# Altium PCB slave-14-mc33775.PcbDoc (part 2 of 5)
Units mil, origin at the board's own origin, x right, y up, seen from the top; angles counter-clockwise.
Board outline 6512.5 x 4562.01 mil, 6 copper layers (Top Copper, Supply, Signal Layer 1, Signal Layer 2, GND, Bot Copper), stack 69.773 mil thick; 427 components, 0 nets, 1131 pads, 1672 vias.
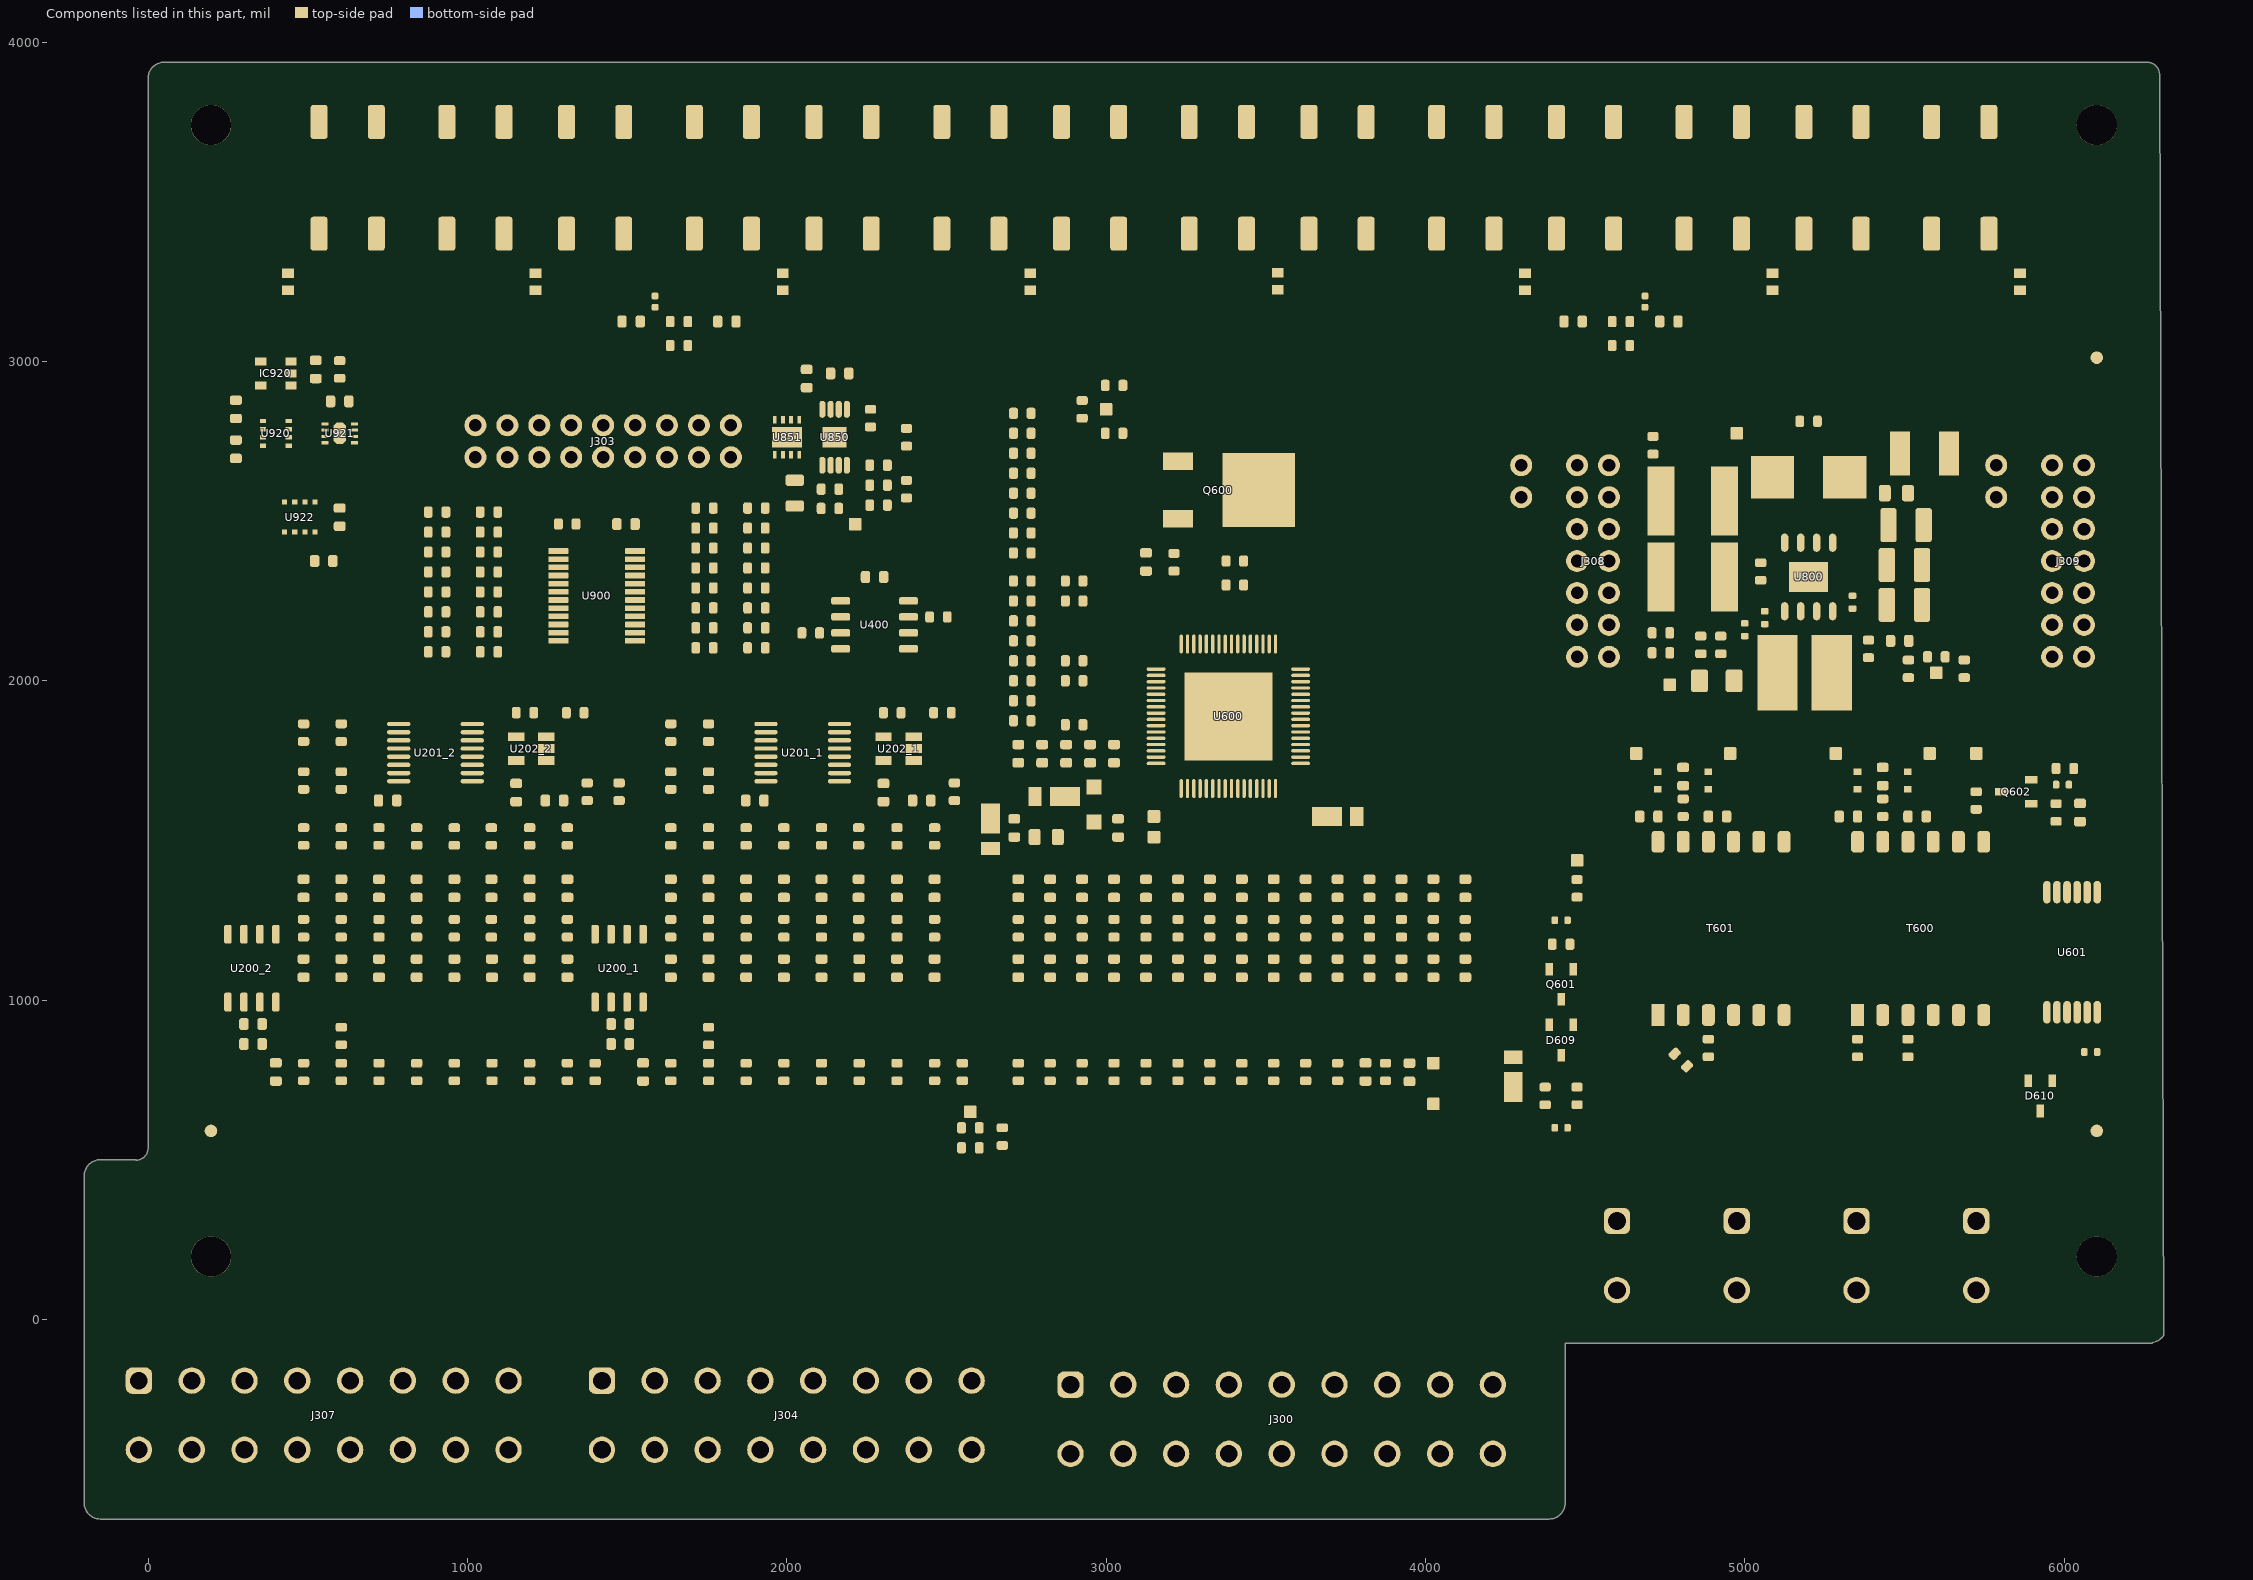
[diagram p6: the components of this part, seen from the top]

## Footprints (in the part's own frame and the unit in brackets; to place one, negate y for a bottom-side part, rotate by r counter-clockwise, add the part's x,y. Pads: shape width x height; smd on the part's side, far side on the other; paste and mask are expansions set on the pad) (continued)
S1MSP1 [mm] "SODFL, 2-Leads, Body 1,78x3,70mm, IPC Medium Density"
  rect 2.4x1.5 smd: 1(0.85,0)
  rect 1.05x1.5 smd: 2(-1.525,0)
  silkscreen extent 1.73,-1.07 1.83,-0.97, body extent -1.85,-0.96 1.85,0.96, height 1
SHT3X [mm] "SON, 8-Leads, Body 2,50x2,50mm, Pitch 0,50mm, Thermal Pad 1,80x1,09mm, IPC Medium Density"
  rect 0.55x0.25 smd: 1(-1.17,0.75) 2(-1.17,0.25) 3(-1.17,-0.25) 4(-1.17,-0.75) 5(1.17,-0.75) 6(1.17,-0.25) 7(1.17,0.25) 8(1.17,0.75)
  oct 1x1.7 smd: 9(0,0)
  Top Copper region: 0,-0.849 0.5,-0.849 0.5,0.851 0,0.851
  Top Copper region: -0.499,-0.85 0.001,-0.85 0.001,0 -0.499,0
  silkscreen extent -1.9,-1.45 1.45,1.5, body extent -1.25,-1.25 1.25,1.25, height 0.9
SOD523_PESD_NEXPERIA [mm] "SODFL, 2-Leads, Body 0,80x1,60mm, IPC Medium Density"
  rect 0.5x0.6 smd: 1(-0.7,0) 2(0.7,0)
  silkscreen extent -0.9,0.55 -0.8,0.65, body extent -0.8,-0.43 0.8,0.43, height 0.65
SOIC127P600X175-8N [mm] "SOIC, 8-Leads, Body 4,90x3,90mm, Pitch 1,27mm, IPC Medium Density"
  rrect50% 1.5x0.6 smd: 1(-2.7,1.905) 2(-2.7,0.635) 3(-2.7,-0.635) 4(-2.7,-1.905) 5(2.7,-1.905) 6(2.7,-0.635) 7(2.7,0.635) 8(2.7,1.905)
  silkscreen extent -2.8,-2.45 1.55,2.8, body extent -3,-2.45 3,2.45, height 1.75
SOT95P237X110-3N [mm] "SOT23, 3-Leads, Body 2,92x2,37mm, Pitch 0,95mm, IPC Medium Density"
  rect 1x0.6 smd: D(1.2,0) G(-1.2,0.95) S(-1.2,-0.95)
  silkscreen extent -0.3,-1.5 0.7,1.5, body extent -1.32,-1.52 1.32,1.52, height 1.1
SOT-23-OT5_L [mm] "SOT23, 5-Leads, Body 2.9x1.7mm, Pitch 0.95mm, Lead Span 2.8mm, IPC High Density"
  rect 0.9x0.65 smd: 1(-1.2,0.95) 2(-1.2,0) 3(-1.2,-0.95) 4(1.2,-0.95) 5(1.2,0.95)
  silkscreen extent -1.33,-1.55 0.35,1.95, body extent -0.9,-1.55 0.9,1.55, height 1.45
SRP7028A [mm] "Bourns SRP7028A Series"
  rect 3.45x3.35 smd: 1(-2.875,0) 2(2.875,0)
  silkscreen extent -3.8,-3.45 3.8,3.45, body extent -3.45,-3.3 3.45,3.3, height 2.86
Testpoint_S1 [mm] "Testpunkt, quardratisch 1mm"
  rrect20% 1x1 smd paste-0.5: 1(0,0)
TPS7A16_VSON [mm] "SON, 8-Leads, Body 3,00x3,00mm, Pitch 0,65mm, Thermal Pad 2,40x1,49mm, IPC Medium Density"
  rect 0.6x0.3 smd: 1(-1.4,0.975) 2(-1.4,0.325) 3(-1.4,-0.325) 4(-1.4,-0.975) 5(1.4,-0.975) 6(1.4,-0.325) 7(1.4,0.325) 8(1.4,0.975)
  rect 1.65x2.4 smd: 9(0,0)
  silkscreen extent -2.15,-1.7 1.7,1.75, body extent -1.55,-1.55 1.55,1.55, height 1
TPS7A16A-Q1 [mm] "TSOP, 8-Leads, Body 3,00x3,00mm, Pitch 0,65mm, Thermal Pad 1,92x1,60mm, IPC Medium Density"
  oval 1.35x0.5 smd: 1(-2.225,0.975) 2(-2.225,0.325) 3(-2.225,-0.325) 4(-2.225,-0.975) 5(2.225,-0.975) 6(2.225,-0.325) 7(2.225,0.325) 8(2.225,0.975)
  rect 1.6x1.92 smd: 9(0,0)
  silkscreen extent -2.35,-1.55 1.15,1.9, body extent -2.45,-1.55 2.45,1.55, height 1.1
TYS6045470M-10 [mm] "Precision Wire Wound Inductor, 2-Leads, Body 6,00x6,00mm, IPC Medium Density"
  rect 3.2x6 smd: 1(-2.15,0) 2(2.15,0)
  silkscreen extent -4.05,-3.15 0.15,3.15, body extent -3.1,-3 3.1,3, height 4.8
Vishay_THJP_0603 [mm] "ThermaWick Ceramic thermal coupling, 2-Leads, Body 1,55x0,84mm, IPC Medium Density"
  rect 0.75x0.95 smd: 1(-0.675,0) 2(0.675,0)
  body extent -0.84,-0.49 0.84,0.49, height 0.89

## Part data
3.3V_DCDC 3.3V_LDO ALARM_IN ALARM_OUT enable_DCDC GND TPL_H_N TPL_H_P TPL_L_N TPL_L_P Vaux Vbat Vbat_con_ext Vddc Vin_DCDC Vmodule: "Testpoint, square", Automotive Qualified=False, Part Number=Testpoint_Square
C200_1 C200_2 C203_1 C203_2 C220_1 C220_2: library part gen_C_ceramic_1u_35V_X7R_0603, "MLCC", Capacitance=1u, Case EIA=0603, Case Metric=1608, Dielectric=X7R, Operating Temperature="-55°C - +125°C", PnP Package=0603C, PnP Value=1uF/35V/X7R, Rated Voltage=35V, Supplier Part Number 1=2906941, AEC-Q Norm=AEC-Q200, Automotive Qualified=True, ECCN=EAR99, Part Number=gen_C_ceramic_1u_35V_X7R_0603, PnP equipped=x, Supplier 1=Farnell
C201_1 C201_2 C212_1 C212_2 C213_1 C213_2 C214_1 C214_2 C215_1 C215_2 C216_1 C216_2 C217_1 C217_2 C218_1 C218_2 C219_1 C219_2 C221_1 C221_2 C400 C601 C603 C604 C605 C606 C613 C617 C807 C850 C852 C900 C920 C921 C922 C923 C924 C925: library part gen_C_ceramic_100n_100V_X7R_0603, "MLCC", Capacitance=100n, Case EIA=0603, Case Metric=1608, Dielectric=X7R, PnP Package=0603C, Rated Voltage=100V, Supplier Part Number 1=490-13420-1-ND, Automotive Qualified=True, Part Number=gen_C_ceramic_100n_100V_X7R_0603, Supplier 1=Digikey, Supplier 2=Mouser, Supplier Part Number 2=81-GCJ188R72A104KA1D
C202_1 C202_2 C204_1 C204_2 C205_1 C205_2 C206_1 C206_2 C207_1 C207_2 C208_1 C208_2 C209_1 C209_2 C210_1 C210_2 C211_1 C211_2 C607 C610: library part gen_C_ceramic_10n_100V_X7R_0603, "MLCC", Capacitance=10n, Case EIA=0603, Case Metric=1608, Dielectric=X7R, PnP Package=0603C, PnP Value=10nF/100V/X7R, Rated Voltage=100V, Supplier Part Number 1=1301715, AEC-Q Norm=AEC-Q200, Automotive Qualified=True, ECCN=EAR99, Part Number=gen_C_ceramic_10n_100V_X7R_0603, Supplier 1=Farnell, Supplier 2=Farnell, Supplier 3=Farnell, Supplier Part Number 2=2821192, Supplier Part Number 3=2210878
C500 C501 C502 C503 C504 C505 C506 C507 C508 C509 C510 C511 C512 C513 C514 C515 C516 C517 C518 C519 C520 C521 C522 C523 C524 C525 C526 C527 C528 C529 C530 C531 C600 C700 C701 C702 C703: library part gen_C_ceramic_47n_100V_X7R_0603, "MLCC", Capacitance=47n, Case EIA=0603, Case Metric=1608, Dielectric=X7R, PnP Package=0603C, Rated Voltage=100V, Supplier Part Number 1=2478249, Automotive Qualified=True, Part Number=gen_C_ceramic_47n_100V_X7R_0603, Supplier 1=Farnell, Supplier 2=Farnell, Supplier 3=Farnell, Supplier Part Number 2=2708699, Supplier Part Number 3=2905110
C602 C608 C609 C612: library part gen_C_ceramic_220p_50V_C0G_0603, "MLCC", Capacitance=220p, Case EIA=0603, Case Metric=1608, Dielectric=C0G, PnP Package=0603C, Rated Voltage=50V, Supplier Part Number 1=603-AC603JRNPO9BN221, AEC-Q Norm=AEC-Q200, Automotive Qualified=True, ECCN=EAR99, Part Number=gen_C_ceramic_220p_50V_C0G_0603, Supplier 1=Mouser
C611: library part gen_C_ceramic_470n_50V_X7R_0603, "MLCC", Capacitance=470n, Case EIA=0603, Case Metric=1608, Dielectric=X7R, PnP Package=0603C, Rated Voltage=50V, Supplier Part Number 1=2547051, AEC-Q Norm=AEC-Q200, Automotive Qualified=True, ECCN=EAR99, Part Number=gen_C_ceramic_470n_50V_X7R_0603, Supplier 1=Farnell
C614 C615 C616 C618: library part gen_C_ceramic_22p_50V_C0G_0402, "MLCC", Capacitance=22p, Case EIA=0402, Case Metric=1005, Dielectric=C0G, PnP Package=0402C, Rated Voltage=50V, Supplier Part Number 1=1856067, Tolerance=1%, Automotive Qualified=True, Part Number=gen_C_ceramic_22p_50V_C0G_0402, Supplier 1=Farnell
C800 C801: library part gen_C_ceramic_15u_100V_X7R_2220, "Stacked MLCC", Capacitance=15u, Case EIA=2220, Case Metric=5750, Dielectric=X7R, Rated Voltage=100V, Supplier Part Number 1=2781468, Automotive Qualified=True, Part Number=gen_C_ceramic_15u_100V_X7R_2220, Supplier 1=Farnell, Supplier 2=Digikey, Supplier 3=Mouser, Supplier Part Number 2=490-5838-1-ND, Supplier Part Number 3=81-KCM55WR72A156MH1K
C802 C803: library part gen_C_ceramic_1u_100V_X7R_1210, "MLCC", Capacitance=1u, Case EIA=1210, Case Metric=3225, Dielectric=X7R, Rated Voltage=100V, Supplier Part Number 1=1301722, Automotive Qualified=True, AVT Set=x, Part Number=gen_C_ceramic_1u_100V_X7R_1210, Supplier 1=Farnell
C804: library part gen_C_ceramic_3u3_100V_X7R_1812, "MLCC", Capacitance=3u3, Case EIA=1812, Case Metric=4532, Dielectric=X7R, Rated Voltage=100V, Supplier Part Number 1=2579025, Automotive Qualified=True, Part Number=gen_C_ceramic_3u3_100V_X7R_1812, Supplier 1=Farnell, Supplier 2=Digikey, Supplier 3=Mouser, Supplier Part Number 2=399-13376-1-ND, Supplier Part Number 3=80-C1812C335K1RAUTO
C805 C808: library part gen_C_ceramic_2n2_100V_X7R_0402, "MLCC", Capacitance=2n2, Case EIA=0402, Case Metric=1005, Dielectric=X7R, PnP Package=0402C, Rated Voltage=100V, Supplier Part Number 1=490-4911-1-ND, Automotive Qualified=True, Part Number=gen_C_ceramic_2n2_100V_X7R_0402, Supplier 1=Digikey
C806: library part gen_C_ceramic_2u2_100V_X7R_1210, "MLCC", Capacitance=2u2, Case EIA=1210, Case Metric=3225, Dielectric=X7R, Rated Voltage=100V, Supplier Part Number 1=2781417, Automotive Qualified=True, AVT Set=x, Part Number=gen_C_ceramic_2u2_100V_X7R_1210, Supplier 1=Farnell, Supplier 2=Farnell, Supplier Part Number 2=2579027
C809: library part gen_C_ceramic_100p_200V_C0G_0402, "MLCC", Capacitance=100p, Case EIA=0402, Case Metric=1005, Dielectric=C0G, PnP Package=0402C, Rated Voltage=200V, Supplier Part Number 1=2426878, Tolerance=5%, Automotive Qualified=True, Part Number=gen_C_ceramic_100p_200V_C0G_0402, Supplier 1=Farnell, Supplier 2=Digikey, Supplier 3="RS Components", Supplier Part Number 2=399-11551-1-ND, Supplier Part Number 3=8353949
C810: library part gen_C_ceramic_22u_6V3_X7R_1206, "MLCC", Capacitance=22u, Case EIA=1206, Case Metric=3216, Dielectric=X7R, Rated Voltage=6.3V, Supplier Part Number 1=2672216, Automotive Qualified=True, Part Number=gen_C_ceramic_22u_6V3_X7R_1206, Supplier 1=Farnell, Supplier 2=Farnell, Supplier Part Number 2=2211066
C851: library part gen_C_ceramic_2u2_10V_X7R_0805, "MLCC", Capacitance=2u2, Case EIA=0805, Case Metric=2012, Dielectric=X7R, Rated Voltage=10V, Supplier Part Number 1=2478259, Automotive Qualified=True, Part Number=gen_C_ceramic_2u2_10V_X7R_0805, Supplier 1=Farnell, Supplier 2=Farnell, Supplier Part Number 2=2070513
D600 D601 D608: "Schottky Diode", Breakdown Voltage=100V, Continuous Forward Current=1A, Manufacturer="Diodes Inc.", Operating Temperature="−55°C - +175°C", PnP Package=POWERDI123, Supplier Part Number 1=621-DFLS1-100Q-7, Automotive Qualified=True, ComponentLink1Description=Datasheet, ComponentLink1URL=https://www.diodes.com/assets/Datasheets/ds30497.pdf, Part Name=DFLS1100Q-7, Part Number=DFLS1100Q-7, Supplier 1=Mouser, Supplier 2=Digikey, Supplier 3=Farnell, Supplier Part Number 2=DFLS1100Q-7DICT-ND, Supplier Part Number 3=3127293
D602: "400W Transient Voltage Suppressor", Breakdown Voltage=70.20V, Manufacturer=Nexperia, Operating Temperature="-55°C - +150°C", Part Name=PTVSxS1UR, Supplier Part Number 1=771-PTVS60VS1UR115, AEC-Q Norm=AEC-Q101, Automotive Qualified=True, ComponentLink1Description=Datasheet, ComponentLink1URL=https://assets.nexperia.com/documents/data-sheet/PTVSXS1UR_SER.pdf, ECCN=EAR99, Part Number=PTVS60VS1UR, Supplier 1=Mouser, Supplier 2=Digikey, Supplier Part Number 2=1727-5879-1-ND
D603: "1.0A surface mount glass passivated rectifier", Breakdown Voltage=1000V, Continuous Forward Current=1A, Manufacturer="Diodes Inc.", Operating Temperature="-55°C - +150°C", Supplier Part Number 1=621-S1MSP1-7, Automotive Qualified=False, ComponentLink1Description=Datasheet, ComponentLink1URL=https://www.mouser.de/datasheet/2/115/S1MSP1-1019698.pdf, ECCN=EAR99, Part Name=S1MSP1-7, Part Number=S1MSP1-7, Supplier 1=Mouser, Supplier 2=Digikey, Supplier Part Number 2=S1MSP1-7-ND
D604 D605 D606 D607: "Very low capacitance bidirectional ESD protection diode", Breakdown Voltage=6.8V, Manufacturer=Nexperia, Operating Temperature="-55°C - +150°C", PnP Package=SOD523, Supplier Part Number 1=771-PESD5V0V1BB115, AEC-Q Norm=AEC-Q101, Automotive Qualified=True, ComponentLink1Description=Datasheet, ComponentLink1URL=https://assets.nexperia.com/documents/data-sheet/PESD5V0V1BB.pdf, ECCN=EAR99, Part Name=PESD5V0V1BB, Part Number=PESD5V0V1BB, Supplier 1=Mouser, Supplier 2=Digikey, Supplier 3=Farnell, Supplier Part Number 2=1727-5808-1-ND, Supplier Part Number 3=2069367
D609 D610: "ESD-Schutzbaustein", Breakdown Voltage=8V, Manufacturer="ON Semiconductor", PnP Package=SOT23-3, Supplier Part Number 1=2317483, Automotive Qualified=True, ComponentLink1Description=Datasheet, ComponentLink1URL=http://www.farnell.com/datasheets/2354265.pdf, Part Name=PACDN042Y3R, Part Number=PACDN042Y3R, Supplier 1=Farnell, Supplier 2=Digikey, Supplier 3=Mouser, Supplier Part Number 2=PACDN042Y3ROSCT-ND, Supplier Part Number 3=748-PACDN042Y3R
FD_LL FD_LR FD_UR: library part Fiducial_2
IC920: library part CMP-0192-00211-1, "2-Wire High-Accuracy Temperature Sensor, Slave Address 000, 5-Pin SOT-23, -55°C to +125°C Temperature, Tape and Reel", Code_IPC=SOT23-5, DatasheetVersion="revD, Nov-2010", PackageDescription="5-Lead Plastic Small Outline Transistor (OT) [SOT-23]", PackageReference=SOT-23-OT5, PackageVersion="revBB, Aug-2009"
J300: library part CMP-1502-00501-2, Color=White, Contact Resistance=10mΩ, Current Rating=6A, Insulation Resistance=1GΩ, Max Operating Temperature=105°C, Min Operating Temperature=-40°C, Operating Supply Voltage=600V, Connector Type="Male Pin, Socket", Contact Material=Copper, Contact Plating=Tin, Fastening Type=Ramp, Gender=Male, Height=12.8mm, Lead Pitch=4.2mm, Length=39mm, Mount="Through Hole", NexarPartId=23024638, Number of Contacts=18, Number of Pins=18, Number of Positions=18, Number of Rows=2, Orientation=Vertical, Pitch=4.2mm, REACH SVHC=Unknown, RoHS=Compliant, Row Spacing=4.191mm, Termination=Solder, Width=39.1mm
J301 J302 J305 J306: library part CMP-1502-00493-2, Color=White, Contact Resistance=10mΩ, Current Rating=9A, Flammability Rating="UL94 V-0", Insulation Resistance=1GΩ, Max Operating Temperature=105°C, Min Operating Temperature=-40°C, Operating Supply Voltage=600V, Connector Type="Male Pin, Socket", Contact Gender=Male, Contact Material=Copper, Contact Plating=Tin, Fastening Type=Ramp, Gender=Male, Height=12.8mm, Housing Material=Nylon, Lead Length=3.5mm, Lead Pitch=4.2mm, Length=5.4mm, Mount="Through Hole", NexarPartId=8917578, Number of Contacts=2, Number of Pins=2, Number of Positions=2, Number of Rows=2, Orientation=Vertical, Pitch=4.2mm, REACH SVHC=Unknown, RoHS=Compliant, Row Spacing=5.5118mm, Termination=Solder, Voltage Rating=600V, Width=5.5mm
J303: "Standard Pinheader, THD, gerade, 2.54mm, 2-reihig", Operating Temperature="−40 °C - +105 °C", Part Name=PinHeader, Rated Current=3A, Rated Voltage=250V, Supplier Part Number 1=2025256, Automotive Qualified=False, Circuits=18, Part Number=gen_pinheader_2.54_2x9, Supplier 1=Farnell
J304 J307: library part CMP-1502-00500-2, Color=White, Contact Resistance=10mΩ, Current Rating=6A, Insulation Resistance=1GΩ, Max Operating Temperature=105°C, Min Operating Temperature=-40°C, Operating Supply Voltage=600V, Connector Type="Male Pin, Socket", Contact Material=Copper, Contact Plating=Tin, Fastening Type=Ramp, Gender=Male, Height=12.8mm, Lead Pitch=4.2mm, Length=34.8mm, Mount="Through Hole", NexarPartId=23024631, Number of Contacts=16, Number of Pins=16, Number of Positions=16, Number of Rows=2, Orientation=Vertical, Pitch=4.2mm, REACH SVHC=Unknown, RoHS=Compliant, Row Spacing=4.191mm, Termination=Solder, Width=34.9mm
J308 J309: "Standard Pinheader, THD, gerade, 2.54mm, 2-reihig", Operating Temperature="−40 °C - +105 °C", Part Name=PinHeader, Rated Current=3A, Rated Voltage=250V, Supplier Part Number 1=200-TSW10707GD, Automotive Qualified=False, Circuits=14, Part Number=gen_pinheader_2.54_2x7, Supplier 1=Mouser
J311 J312: "Standard Pinheader, THD, gerade, 2.54mm", Operating Temperature="−40 °C - +105 °C", Part Name=PinHeader, Rated Current=3A, Rated Voltage=250V, Supplier Part Number 1=2505044, Automotive Qualified=False, Circuits=2, Part Number=gen_pinheader_2.54_2, Supplier 1=Farnell
L800: library part SRP7028A-R47M, "FIXED IND 470NH 17.5A 4.2 MOHM", Manufacturer="Bourns Inc", Operating Temperature="-40°C - +150°C", Rated Current=17.5A, Saturation Current=26A, Supplier Part Number 1=SRP7028A-R47MCT-ND, Automotive Qualified=True, ComponentLink1Description=Datasheet, ComponentLink1URL=https://www.bourns.com/docs/Product-Datasheets/SRP7028A.pdf, Inductance=470nH, Part Number=SRP7028A-R47M, Supplier 1=Digikey, Supplier 2=Farnell, Supplier Part Number 2=2434106
L801: library part TYS6045470M-10, "Power Inductor", Manufacturer="Laird-Signal Integrity Products", Operating Temperature="-55°C - +150°C", Rated Current=1.2A, Saturation Current=1.4A, Supplier Part Number 1=240-2745-1-ND, Automotive Qualified=True, ComponentLink1Description=Datasheet, ComponentLink1URL=http://assets.lairdtech.com/home/brandworld/files/TYS6045470M-10.pdf, Inductance=47µH, Part Number=TYS6045470M-10, Supplier 1=Digikey
LD600 LD601 LD800 LD850: library part LED_0603_green_AECQ, "TLMG1100-GS08", Breakdown Voltage=5V, Continuous Forward Current=20mA, Forward Voltage @ 20mA=2.1V, Manufacturer=Vishay, Operating Temperature="-40°C - 100°C", PnP Package=LED_0603, Supplier Part Number 1=2293494, Automotive Qualified=True, Color=green, ComponentLink1Description=Datasheet, ComponentLink1URL=http://www.farnell.com/datasheets/2049164.pdf, Part Number=LED_0603_green_AECQ, Supplier 1=Farnell, Supplier 2=Digikey, Supplier Part Number 2=751-1165-1-ND
MP_LL MP_LR MP_UL MP_UR: "Hole, M3, with Isolation", Automotive Qualified=False, Part Number=Hole_3.2_Iso
Q600: "100V, 3A NPN high power bipolar transistor", Manufacturer=Nexperia, Operating Temperature="-55°C - +150°C", Part Name=MJD31CA, Supplier Part Number 1=771-MJD31CAJ, AEC-Q Norm=AEC-Q101, Automotive Qualified=True, ComponentLink1Description=Datasheet, ComponentLink1URL=https://www.mouser.de/datasheet/2/916/MJD31CA-1665957.pdf, ECCN=EAR99, Part Number=MJD31CAJ, Supplier 1=Mouser, Supplier 2=Digikey, Supplier Part Number 2=1727-8685-1-ND
Q601 Q602: "MOSFET-Transistor, n-Kanal, 1.6 A, 100 V, 0.250 ohm", Manufacturer=Diodes, Maximum Continous Drain Current (25°C)=1.6A, Maximum Drain-Source Voltage=100V, Operating Temperature="-55°C - +150°C", Part Name=NMOS, Supplier Part Number 1=DMN10H220L-7DICT-ND, Automotive Qualified=True, ComponentLink1Description=Datasheet, ComponentLink1URL=https://www.diodes.com/assets/Datasheets/DMN10H220L.pdf, Part Number=DMN10H220L-7, R_DS(on)=250m, Supplier 1=Digikey, Total Gate Charge=4.1nC
R100 R200_1 R200_2 R201_1 R201_2 R202_1 R202_2 R203_1 R203_2 R204_1 R204_2 R205_1 R205_2 R210_1 R210_2 R211_1 R211_2 R212_1 R212_2 R213_1 R213_2 R214_1 R214_2 R215_1 R215_2 R216_1 R216_2 R217_1 R217_2 R230_1 R230_2 R232_1 R232_2 R516 R517 R518 R519 R520 R521 R522 R523 R524 R525 R526 R601 R602 R603 R606 R607 R608 R609 R610 R612 R613 R614 R615 R619 R620 R622 R623 R624 R625 R626 R629 R630 R631 R633 R635 R636 R637 R639 R640 R801 R803 R807 R850 R851 R853: library part gen_R_0R_0603, "SMD Resistor 0R 0603", Case EIA=0603, Case Metric=1608, Maximum Working Voltage=75V, Operating Temperature="-55°C - +155°C", PnP Package=0603R, Power=0.1W, Supplier Part Number 1=2616580, Automotive Qualified=True, Part Number=gen_R_0R_0603, PnP equipped=x, PnP Value=0R, Resistance=0R, Series=Jumper, Supplier 1=Farnell
R206_1 R206_2 R207_1 R207_2 R208_1 R208_2 R209_1 R209_2 R218_1 R218_2 R219_1 R219_2 R220_1 R220_2 R221_1 R221_2 R500 R501 R502 R503 R504 R505 R506 R507 R508 R509 R510 R511 R512 R513 R514 R515 R700 R701 R702 R703 R810 R916 R920: library part gen_R_10k_0603, "SMD Resistor 10k 0603", Case EIA=0603, Case Metric=1608, Maximum Working Voltage=75V, Operating Temperature="-55°C - +155°C", PnP Package=0603R, Power=0.1W, Supplier Part Number 1=2073349, Tolerance=1%, Automotive Qualified=True, Part Number=gen_R_10k_0603, PnP Value=10k, Resistance=10k, Series="E24, E96", Supplier 1=Farnell
R222_1 R222_2 R223_1 R223_2 R224_1 R224_2 R225_1 R225_2 R226_1 R226_2 R227_1 R227_2 R228_1 R228_2 R229_1 R229_2 R231_1 R231_2: library part gen_R_1k_0603, "SMD Resistor 1k 0603", Case EIA=0603, Case Metric=1608, Maximum Working Voltage=75V, Operating Temperature="-55°C - +155°C", PnP Package=0603R, Power=0.1W, Supplier Part Number 1=1652848, Tolerance=1%, Automotive Qualified=True, Part Number=gen_R_1k_0603, PnP equipped=x, PnP Value=1k, Resistance=1k, Series="E24, E96", Supplier 1=Farnell
R400 R401 R616 R617 R627 R641: library part gen_R_5k1_0603, "SMD Resistor 5k1 0603", Case EIA=0603, Case Metric=1608, Maximum Working Voltage=75V, Operating Temperature="-55°C - +155°C", PnP Package=0603R, Power=0.1W, Supplier Part Number 1=667-ERJ-3GEYJ512V, Tolerance=5%, AEC-Q Norm=AEC-Q200, Automotive Qualified=True, ECCN=EAR99, Part Number=gen_R_5k1_0603, PnP Value=5k1, Resistance=5k1, Series=E24, Supplier 1=Mouser
R600: library part gen_R_10R_0805, "SMD Resistor 10R 0805", Case EIA=0805, Case Metric=2012, Maximum Working Voltage=150V, Operating Temperature="-55°C - +155°C", PnP Package=0805R, Power=0.125W, Supplier Part Number 1=1750728, Tolerance=1%, AEC-Q Grade="Grade 0", AEC-Q Norm=AEC-Q200, Automotive Qualified=True, ECCN=EAR99, Part Number=gen_R_10R_0805, PnP Value=10R, Resistance=10R, Series="E24, E96", Supplier 1=Farnell
R604: library part gen_R_270R_0603, "SMD Resistor 270R 0603", Case EIA=0603, Case Metric=1608, Maximum Working Voltage=75V, Operating Temperature="-55°C - +155°C", PnP Package=0603R, Power=0.1W, Supplier Part Number 1=2141320, Tolerance=1%, Automotive Qualified=True, Part Number=gen_R_270R_0603, PnP Value=270R, Resistance=270R, Series=E24, Supplier 1=Farnell
R605: library part gen_R_2k7_0603, "SMD Resistor 2k7 0603", Case EIA=0603, Case Metric=1608, Maximum Working Voltage=75V, Operating Temperature="-55°C - +155°C", PnP Package=0603R, Power=0.1W, Tolerance=1%, Automotive Qualified=False, Part Number=gen_R_2k7_0603, PnP Value=2k7, Resistance=2k7, Series=E24
R611 R621 R628 R632 R634 R642: library part gen_R_150R_0603, "SMD Resistor 150R 0603", Case EIA=0603, Case Metric=1608, Maximum Working Voltage=75V, Operating Temperature="-55°C - +155°C", PnP Package=0603R, Power=0.1W, Supplier Part Number 1=2303076, Tolerance=1%, AEC-Q Grade="Grade 0", AEC-Q Norm=AEC-Q200, Automotive Qualified=True, ECCN=EAR99, Part Number=gen_R_150R_0603, PnP Value=150R, Resistance=150R, Series="E24, E96", Supplier 1=Farnell
R618: library part gen_R_13R7_0603, "SMD Resistor 13R7 0603", Case EIA=0603, Case Metric=1608, Maximum Working Voltage=75V, Operating Temperature="-55°C - +155°C", PnP Package=0603R, Power=0.1W, Tolerance=1%, Automotive Qualified=False, Part Number=gen_R_13R7_0603, PnP Value=13R7, Resistance=13R7, Series=E96
R638 R643 R808 R900 R901 R902 R903 R904 R905 R906 R907 R908 R909 R910 R911 R912 R913 R914 R915 R917 R918 R919 R921 R922 R923 R924 R925 R926 R927 R928 R929 R930 R931 R932 R933: library part gen_R_100k_0603, "SMD Resistor 100k 0603", Case EIA=0603, Case Metric=1608, Maximum Working Voltage=75V, Operating Temperature="-55°C - +155°C", PnP Package=0603R, Power=0.1W, Supplier Part Number 1=2303232, Tolerance=1%, Automotive Qualified=True, Part Number=gen_R_100k_0603, PnP equipped=x, PnP Value=100k, Resistance=100k, Series="E24, E96", Supplier 1=Farnell
R704 R705: library part gen_R_10k_NTC_0402, "SMD Resistor 10k NTC 0402", Case EIA=0402, Maximum Working Voltage=50V, Operating Temperature="-40°C - +150°C", Power=0.150W, Supplier Part Number 1=2432559, Automotive Qualified=True, Part Number=gen_R_10k_NTC_0402, Resistance="10k NTC", Series=NTC, Supplier 1=Farnell, Supplier 2=Digikey, Supplier Part Number 2=495-76289-1-ND
R706 R707 R708 R709 R710 R711 R712 R713: library part Vishay_THJP_0603, "ThermaWick thermal coupling 0603", Case EIA=0603, Maximum Working Voltage=1.5kV, Supplier Part Number 1=71-THJP0603AST1, Automotive Qualified=False, ECCN=EAR99, Part Number=Vishay_THJP_0603, Resistance=ThermaWick, Series="Thermal Jumper", Supplier 1=Mouser
R714 R715 R716 R717 R718 R719 R720 R721 R722 R723 R724 R725 R726 R727 R728 R729 R730 R731 R732 R733 R734 R735 R736 R737 R738 R739 R740 R741: library part gen_R_68R_2010, "SMD Resistor 68R 2010", Case EIA=2010, Case Metric=5025, Maximum Working Voltage=200V, Operating Temperature="-55°C - +155°C", PnP Package=2010R, Power=0.75W, Supplier Part Number 1=2323988, Tolerance=1%, Automotive Qualified=True, Part Number=gen_R_68R_2010, PnP Value=68R, Resistance=68R, Series=E24, Supplier 1=Farnell
R800: library part gen_R_100R_0603, "SMD Resistor 100R 0603", Case EIA=0603, Case Metric=1608, Maximum Working Voltage=75V, Operating Temperature="-55°C - +155°C", PnP Package=0603R, Power=0.1W, Supplier Part Number 1=P100HCT-ND, Tolerance=1%, Automotive Qualified=True, Part Number=gen_R_100R_0603, PnP equipped=x, PnP Value=100R, Resistance=100R, Series="E24, E96", Supplier 1=Digikey
R802: library part gen_R_0R1_0805, "SMD Resistor 0R1 0805", Case EIA=0805, Maximum Working Voltage=150V, Operating Temperature="-55°C - +155°C", Power=250mW, Supplier Part Number 1=2824733, Automotive Qualified=True, Part Number=gen_R_0R1_0805, Resistance=0R1, Supplier 1=Farnell, Supplier 2=Digikey, Supplier Part Number 2=CRM0805AJX-R100ELFCT-ND
R804 R854: library part gen_R_240R_0603, "SMD Resistor 240R 0603", Case EIA=0603, Case Metric=1608, Maximum Working Voltage=75V, Operating Temperature="-55°C - +155°C", PnP Package=0603R, Power=0.1W, Supplier Part Number 1=667-ERJ-3EKF2400V, Tolerance=1%, AEC-Q Norm=AEC-Q200, Automotive Qualified=True, ECCN=EAR99, Part Number=gen_R_240R_0603, PnP Value=240R, Resistance=240R, Series=E24, Supplier 1=Mouser
R805: library part gen_R_287k_0603, "SMD Resistor 287k 0603", Case EIA=0603, Case Metric=1608, Maximum Working Voltage=75V, Operating Temperature="-55°C - +155°C", PnP Package=0603R, Power=0.1W, Supplier Part Number 1=667-ERJ-3EKF2873V, Tolerance=1%, AEC-Q Norm=AEC-Q200, Automotive Qualified=True, ECCN=EAR99, Part Number=gen_R_287k_0603, PnP Value=287k, Resistance=287k, Series=E96, Supplier 1=Mouser
R806: library part gen_R_174k_0603, "SMD Resistor 174k 0603", Case EIA=0603, Case Metric=1608, Maximum Working Voltage=75V, Operating Temperature="-55°C - +155°C", PnP Package=0603R, Power=0.1W, Supplier Part Number 1=667-ERJ-3EKF1743V, Tolerance=1%, AEC-Q Norm=AEC-Q200, Automotive Qualified=True, ECCN=EAR99, Part Number=gen_R_174k_0603, PnP Value=174k, Resistance=174k, Series=E96, Supplier 1=Mouser
R809: library part gen_R_27k4_0603, "SMD Resistor 27k4 0603", Case EIA=0603, Case Metric=1608, Maximum Working Voltage=75V, Operating Temperature="-55°C - +155°C", PnP Package=0603R, Power=0.1W, Supplier Part Number 1=667-ERJ-3EKF2742V, Tolerance=1%, AEC-Q Norm="AEC-Q 200", Automotive Qualified=True, ECCN=EAR99, Part Number=gen_R_27k4_0603, PnP Value=27k4, Resistance=27k4, Series=E96, Supplier 1=Mouser
R852: library part gen_R_1M_0603, "SMD Resistor 1M 0603", Case EIA=0603, Case Metric=1608, Maximum Working Voltage=75V, Operating Temperature="-55°C - +155°C", PnP Package=0603R, Power=0.1W, Supplier Part Number 1=1469746, Tolerance=1%, Automotive Qualified=True, Part Number=gen_R_1M_0603, PnP Value=1M, Resistance=1M, Series="E24, E96", Supplier 1=Farnell
T600 T601: "Pulse HM2102NLT BMS Transformer", Manufacturer=Pulse, Operating Temperature="-40°C - +125°C", Supplier Part Number 1=673-HM2102NLT, AEC-Q Norm=AEC-Q200, Automotive Qualified=True, ComponentLink1Description=Datasheet, ComponentLink1URL=https://www.mouser.de/datasheet/2/336/HM2102NL-1218600.pdf, ECCN=EAR99, Part Number=HM2102NLT, Supplier 1=Mouser, Supplier 2=Digikey, Supplier Part Number 2=1840-1034-1-ND
U200_1 U200_2: "Ultralow Noise, High Accuracy 4.096V Reference", Manufacturer="Analog Devices", Operating Temperature="−40°C - +125°C", PnP Package=SO-8, Supplier Part Number 1=2112692, AEC-Q Grade=unknown, AEC-Q Norm=AEC-Q100, Automotive Qualified=True, ComponentLink1Description=Datasheet, ComponentLink1URL=http://www.analog.com/media/en/technical-documentation/data-sheets/ADR4520_4525_4530_4533_4540_4550.pdf, ECCN=EAR99, Part Name=ADR4540BRZ, Part Number=ADR4540BRZ, Supplier 1=Farnell, Supplier 2=Mouser, Supplier 3=Digikey, Supplier Part Number 2=584-ADR4540BRZ, Supplier Part Number 3=ADR4540BRZ-ND
U201_1 U201_2: library part CMP-0798-00197-1, "CMOS, Low Voltage, 2-Wire Serially Controlled, Matrix Switch, -40 to 85 degC, 16-pin SOP (RU-16), Tube", Manufacturer="Analog Devices", Bandwidth (Hz)=65M, Code_JEDEC=MO-153AB, ComponentLink1Description="Manufacturer URL", ComponentLink1URL=http://www.analog.com/en/index.html, ComponentLink2Description=Datasheet, ComponentLink2URL=http://www.analog.com/static/imported-files/data_sheets/ADG728_729.pdf, ComponentLink3Description="Package Specification", ComponentLink3URL=http:/www.analog.com/static/imported-files/packages/36244347913743854010197452789RU16.pdf, DatasheetVersion="Rev. C", Max Analog Signal Range="0 to Vdd", Mounting Technology="Surface Mount", PackageDescription="16-Pin Thin Shrink Small Outline Package, Body 5 x 4.4 mm, Pitch 0.65 mm", PackageReference=RU-16, PackageVersion=Nov-02, Packing=Tube, PartNumber=ADG728BRUZ, Ron (ohms)=2.5, Supply V Guar Performance="Single_(+3V), Single_(+5V)"
U202_1 U202_2: library part CMP-0384-01512-2, "Single Channel RRIO Operational Amplifier, 2.5 MHz BW, 1 V/us SR, Industrial, 5-pin SOT23 (RJ-5), Reel", Amplifiers Per Package=1, Generic Part Number=AD8628, Input Bias Current=30pA, Input Offset Voltage=1uV, Manufacturer="Analog Devices", Automotive Qualified=Yes, Code_JEDEC=MO-178-AA, ComponentLink1Description="Manufacturer URL", ComponentLink1URL=http://www.analog.com/en/index.html, ComponentLink2Description=Datasheet, ComponentLink2URL=http://www.analog.com/static/imported-files/data_sheets/AD8628_8629_8630.pdf, ComponentLink3Description="Package Specification", ComponentLink3URL=http://www.analog.com/static/imported-files/packages/PKG_PDF/SOT-23(RJ)/RJ_5.pdf, ComponentLink4Description="Reference Circuit", ComponentLink4URL=http://www.analog.com/en/all-operational-amplifiers-op-amps/operational-amplifiers-op-amps/ad8628/products/product.html#product-recommendations, DatasheetVersion="Rev. I", Iq/Amp=1.1mA, Mounting Technology="Surface Mount", PackageDescription="5-Pin Small Outline Transistor Package, Body 2.9 x 1.6 mm, Pitch 0.95 mm", PackageReference=RJ-5, PackageVersion=121608-A, PartNumber=AD8628ARTZ-R2, RevisionNote="Reference Circuit URL fixed", Slew Rate=1V/us, Small Signal Bandwidth=2.5MHz, V Span Max=6V, V Span Min=2.7V
U400: "Automotive 2-Mbit serial I²C  / bus EEPROM with 1 MHz clock", Manufacturer=STMicroelectronics, Operating Temperature="-40°C - +125°C", PnP Package=SO8N, Supplier Part Number 1=497-16238-1-ND, Automotive Qualified=True, ComponentLink1Description=Datasheet, ComponentLink1URL=http://www.st.com/content/ccc/resource/technical/document/datasheet/83/f4/3e/e4/4e/49/42/c5/DM00200595.pdf/files/DM00200595.pdf/jcr:content/translations/en.DM00200595.pdf, Part Name=M24M02-DWMN3TP/K, Part Number=M24M02-DWMN3TP/K, Supplier 1=Digikey, Supplier 2=Mouser, Supplier 3=Farnell, Supplier Part Number 2=511-M24M02-DWMN3TP/K, Supplier Part Number 3=2849971
U600: "14 Cells Battery Cell Controller IC", Manufacturer=NXP, Operating Temperature="−40°C - +125°C", AEC-Q Grade="Grade 1", AEC-Q Norm=AEC-Q100, Automotive Qualified=True, Part Name=MC33775A, Part Number=MC33775A
U601: "15MBd Dual-channel Bi-directional Optocoupler", Manufacturer=Broadcom, Operating Temperature="-40°C - +125°C", PnP Package=12-BSOP, Supplier Part Number 1=516-3808-ND, AEC-Q Grade="Grade 1", AEC-Q Norm=AEC-Q100, Automotive Qualified=True, ComponentLink1Description=Datasheet, ComponentLink1URL=https://docs.broadcom.com/docs/AV02-4835EN, ECCN=EAR99, Part Name=ACFL-6211T-000E, Part Number=ACFL-6211T-000E, Supplier 1=Digikey, Supplier 2=Mouser, Supplier Part Number 2=630-ACFL6211T000E
U800: "100-V Input, 0.5-A SynchronousBuck DC/DCConverterwith Ultra-lowIQ", Manufacturer="Texas Instruments", Operating Temperature="-40°C - +125°C", Supplier Part Number 1=296-53561-1-ND, Automotive Qualified=True, ComponentLink1Description=Datasheet, ComponentLink1URL=http://www.ti.com/lit/ds/symlink/lm5163-q1.pdf, Part Name=LM5163-Q1, Part Number=LM5163-Q1, Supplier 1=Digikey, Supplier 2=Mouser, Supplier Part Number 2=595-LM5163QDDARQ1
U850: "Automotive 60-V, 5-µA IQ, 100-mA low-dropout (LDO) voltage regulator with enable and power good", Manufacturer="Texas Instruments", Operating Temperature="-40°C - +125°C", Part Name=TPS7A16A-Q1, PnP Package=HVSSOP-8, Supplier Part Number 1=296-TPS7A1633AQDGNRQ1TR-ND, AEC-Q Grade="Grade 1", AEC-Q Norm=AEC-Q100, Automotive Qualified=True, ComponentLink1Description=Datasheet, ComponentLink1URL=http://www.ti.com/lit/ds/symlink/tps7a16a-q1.pdf, ECCN=EAR99, Part Number=TPS7A1633AQDGNRQ1, Supplier 1=Digikey, Supplier 2=Mouser, Supplier Part Number 2=595-PS7A1633AQDGNRQ1
U851: "Automotive 60-V, 5-µA IQ, 100-mA low-dropout (LDO) voltage regulator with enable and power good", Manufacturer="Texas Instruments", Operating Temperature="-40°C - +125°C", Part Name=TPS7A16A-Q1, PnP Package=VSON-8, Supplier Part Number 1="595-TPS7A1633DRBR / 595-TPS7A1633DRBR / 595-TPS7A1633DRBR", Automotive Qualified=False, ComponentLink1Description=Datasheet, ComponentLink1URL=https://www.ti.com/lit/ds/symlink/tps7a16.pdf, ECCN=EAR99, Part Number=TPS7A1633DRBR, Supplier 1=Mouser
U900: library part CMP-0314-00251-2, "Remote 16-Bit I2C and SMBus, Low-Power I/O Expander with Interrupt Output, Reset & Config. Register, 1.65 to 5.5 V, -40 to 85 degC, 24-pin TSSOP (PW), Green (RoHS & no Sb/Br)", 5V Tolerant I/O=Yes, Manufacturer="Texas Instruments", Max Frequency(kHz)=400, # of I/Os=16, Code_JEDEC=MO-153, ComponentLink1Description=Datasheet, ComponentLink1URL=http://www.ti.com/general/docs/lit/getliterature.tsp?genericPartNumber=TCA9539&fileType=pdf, ComponentLink2Description="Package Specification", ComponentLink2URL=http://www.ti.com/litv/pdf/mpds177g, Configuration Registers=Yes, DatasheetVersion=SCPS202A, Eco-Plan="Green (RoHS & no Sb/Br)", I2C Address="1110 1xx", Interrupt Output=Yes, Low Power=Yes, Mounting Technology="Surface Mount", PackageDescription="24-Pin Thin Small Outline Package 0.65 mm Pitch", PackageReference=PW0024A, PackageVersion="revG, Feb-2011", PartNumber=TCA9539PWR, Push-Pull I/O Type=Yes, Reset Input=Yes, SubFamily="I2C IO Expander", Vcc range(V)="1.65 to 5.5"
U920: "Low power pressure, temperature & humidity sensor", Manufacturer="Bosch Sensortec", Operating Temperature="-40°C - +85°C", PnP Package=LGA, Supplier Part Number 1=828-1063-1-ND, Automotive Qualified=False, ComponentLink1Description=Datasheet, ComponentLink1URL=https://ae-bst.resource.bosch.com/media/_tech/media/datasheets/BST-BME280-DS002.pdf, Datasheet URL=http://datasheet.octopart.com/BME280-Bosch-datasheet-58577763.pdf, Datasheet Version="Rev. 1.2, 10/2015", Manufacturer URL=http://www.bosch-sensortec.com, Part Name=BME280, Part Number=BME280, Supplier 1=Digikey, Supplier 2=Mouser, Supplier Part Number 2=262-BME280
U921: "Humidity/Temp Sensor, Digital, Dfn-8", Manufacturer=Sensirion, Operating Temperature="-40°C - +125°C", PnP Package=DFN, Supplier Part Number 1=2886656, Automotive Qualified=True, ComponentLink1Description=Datasheet, ComponentLink1URL=http://www.farnell.com/datasheets/2756487.pdf, Part Name=SHT35-DIS-F, Part Number=SHT35-DIS-F, Supplier 1=Farnell, Supplier 2=Digikey, Supplier 3=Mouser, Supplier Part Number 2=1649-1067-1-ND, Supplier Part Number 3=403-SHT35-DIS-F
U922: "Low power gas, pressure, temperature & humidity sensor", Manufacturer="Bosch Sensortec", Operating Temperature="-40°C - +85°C", PnP Package=LGA, Supplier Part Number 1=828-1077-1-ND, Automotive Qualified=False, ComponentLink1Description=Datasheet, ComponentLink1URL=https://ae-bst.resource.bosch.com/media/_tech/media/datasheets/BST-BME680-DS001.pdf, Part Name=BME680, Part Number=BME680, Supplier 1=Digikey, Supplier 2=Mouser, Supplier Part Number 2=262-BME680

## Via types
v1: diameter 23.62, hole 15.75, Top Copper to Bot Copper, 1585 vias
v2: diameter 19.68, hole 11.81, Top Copper to Bot Copper, 87 vias

## Nets (pads, with @x,y where several pads share a name; then routed paths per layer and width w, separated by ;. In a path a pad name is that pad's centre, name@x,y a point inside that pad or via, vN(x,y) a via of type N, cw(c..) or ccw(c..) an arc to the next point about the centre after c; other vN are vias at no path point)
pads on no net: 3.3V_DCDC.1 3.3V_LDO.1 ALARM_IN.1 ALARM_OUT.1 C200_1.1 C200_1.2 C200_2.1 C200_2.2 C201_1.1 C201_1.2 C201_2.1 C201_2.2 C202_1.1 C202_1.2 C202_2.1 C202_2.2 C203_1.1 C203_1.2 C203_2.1 C203_2.2 C204_1.1 C204_1.2 C204_2.1 C204_2.2 C205_1.1 C205_1.2 C205_2.1 C205_2.2 C206_1.1 C206_1.2 C206_2.1 C206_2.2 C207_1.1 C207_1.2 C207_2.1 C207_2.2 C208_1.1 C208_1.2 C208_2.1 C208_2.2 C209_1.1 C209_1.2 C209_2.1 C209_2.2 C210_1.1 C210_1.2 C210_2.1 C210_2.2 C211_1.1 C211_1.2 C211_2.1 C211_2.2 C212_1.1 C212_1.2 C212_2.1 C212_2.2 C213_1.1 C213_1.2 C213_2.1 C213_2.2 C214_1.1 C214_1.2 C214_2.1 C214_2.2 C215_1.1 C215_1.2 C215_2.1 C215_2.2 C216_1.1 C216_1.2 C216_2.1 C216_2.2 C217_1.1 C217_1.2 C217_2.1 C217_2.2 C218_1.1 C218_1.2 C218_2.1 C218_2.2 C219_1.1 C219_1.2 C219_2.1 C219_2.2 C220_1.1 C220_1.2 C220_2.1 C220_2.2 C221_1.1 C221_1.2 C221_2.1 C221_2.2 C400.1 C400.2 C500.1 C500.2 C501.1 C501.2 C502.1 C502.2 C503.1 C503.2 C504.1 C504.2 C505.1 C505.2 C506.1 C506.2 C507.1 C507.2 C508.1 C508.2 C509.1 C509.2 C510.1 C510.2 C511.1 C511.2 C512.1 C512.2 C513.1 C513.2 C514.1 C514.2 C515.1 C515.2 C516.1 C516.2 C517.1 C517.2 C518.1 C518.2 C519.1 C519.2 C520.1 C520.2 C521.1 C521.2 C522.1 C522.2 C523.1 C523.2 C524.1 C524.2 C525.1 C525.2 C526.1 C526.2 C527.1 C527.2 C528.1 C528.2 C529.1 C529.2 C530.1 C530.2 C531.1 C531.2 C600.1 C600.2 C601.1 C601.2 C602.1 C602.2 C603.1 C603.2 C604.1 C604.2 C605.1 C605.2 C606.1 C606.2 C607.1 C607.2 C608.1 C608.2 C609.1 C609.2 C610.1 C610.2 C611.1 C611.2 C612.1 C612.2 C613.1 C613.2 C614.1 C614.2 C615.1 C615.2 C616.1 C616.2 C617.1 C617.2 C618.1 C618.2 C700.1 C700.2 C701.1 C701.2 C702.1 C702.2 C703.1 C703.2 C800.1 C800.2 C801.1 C801.2 C802.1 C802.2 C803.1 C803.2 C804.1 C804.2 C805.1 C805.2 C806.1 C806.2 C807.1 C807.2 C808.1 C808.2 C809.1 C809.2 C810.1 C810.2 C850.1 C850.2 C851.1 C851.2 C852.1 C852.2 C900.1 C900.2 C920.1 C920.2 C921.1 C921.2 C922.1 C922.2 C923.1 C923.2 C924.1 C924.2 C925.1 C925.2 D600.1 D600.2 D601.1 D601.2 D602.1 D602.2 D603.1 D603.2 D604.1 D604.2 D605.1 D605.2 D606.1 D606.2 D607.1 D607.2 D608.1 D608.2 D609.1 D609.2 D609.3 D610.1 D610.2 D610.3 enable_DCDC.1 FD_LL.0 FD_LR.0 FD_UR.0 GND.1 IC920.1 IC920.2 IC920.3 IC920.4 IC920.5 J300.1 J300.2 J300.3 J300.4 J300.5 J300.6 J300.7 J300.8 J300.9 J300.10 J300.11 J300.12 J300.13 J300.14 J300.15 J300.16 J300.17 J300.18 J301.1 J301.2 J302.1 J302.2 J303.1 J303.2 J303.3 J303.4 J303.5 J303.6 J303.7 J303.8 J303.9 J303.10 J303.11 J303.12 J303.13 J303.14 J303.15 J303.16 J303.17 J303.18 J304.1 J304.2 J304.3 J304.4 J304.5 J304.6 J304.7 J304.8 J304.9 J304.10 J304.11 J304.12 J304.13 J304.14 J304.15 J304.16 J305.1 J305.2 J306.1 J306.2 J307.1 J307.2 J307.3 J307.4 J307.5 J307.6 J307.7 J307.8 J307.9 J307.10 J307.11 J307.12 J307.13 J307.14 J307.15 J307.16 J308.1 J308.2 J308.3 J308.4 J308.5 J308.6 J308.7 J308.8 J308.9 J308.10 J308.11 J308.12 J308.13 J308.14 J309.1 J309.2 J309.3 J309.4 J309.5 J309.6 J309.7 J309.8 J309.9 J309.10 J309.11 J309.12 J309.13 J309.14 J311.1 J311.2 J312.1 J312.2 L800.1 L800.2 L801.1 L801.2 LD600.1 LD600.2 LD601.1 LD601.2 LD800.1 LD800.2 LD850.1 LD850.2 MP_LL.Hole_3.2_Iso MP_LR.Hole_3.2_Iso MP_UL.Hole_3.2_Iso MP_UR.Hole_3.2_Iso Q600.1 Q600.2 Q600.3 Q600.4 Q601.D Q601.G Q601.S Q602.D Q602.G Q602.S R100.1 R100.2 R200_1.1 R200_1.2 R200_2.1 R200_2.2 R201_1.1 R201_1.2 R201_2.1 R201_2.2 R202_1.1 R202_1.2 R202_2.1 R202_2.2 R203_1.1 R203_1.2 R203_2.1 R203_2.2 R204_1.1 R204_1.2 R204_2.1 R204_2.2 R205_1.1 R205_1.2 R205_2.1 R205_2.2 R206_1.1 R206_1.2 R206_2.1 R206_2.2 R207_1.1 R207_1.2 R207_2.1 R207_2.2 R208_1.1 R208_1.2 R208_2.1 R208_2.2 R209_1.1 R209_1.2 R209_2.1 R209_2.2 R210_1.1 R210_1.2 R210_2.1 R210_2.2 R211_1.1 R211_1.2 R211_2.1 R211_2.2 R212_1.1 R212_1.2 R212_2.1 R212_2.2 R213_1.1 R213_1.2 R213_2.1 R213_2.2 R214_1.1 R214_1.2 R214_2.1 R214_2.2 R215_1.1 R215_1.2 R215_2.1 R215_2.2 R216_1.1 R216_1.2 R216_2.1 R216_2.2 R217_1.1 R217_1.2 R217_2.1 R217_2.2 R218_1.1 R218_1.2 R218_2.1 R218_2.2 R219_1.1 R219_1.2 R219_2.1 R219_2.2 R220_1.1 R220_1.2 R220_2.1 R220_2.2 R221_1.1 R221_1.2 R221_2.1 R221_2.2 R222_1.1 R222_1.2 R222_2.1 R222_2.2 R223_1.1 R223_1.2 R223_2.1 R223_2.2 R224_1.1 R224_1.2 R224_2.1 R224_2.2 R225_1.1 R225_1.2 R225_2.1 R225_2.2 R226_1.1 R226_1.2 R226_2.1 R226_2.2 R227_1.1 R227_1.2 R227_2.1 R227_2.2 R228_1.1 R228_1.2 R228_2.1 R228_2.2 R229_1.1 R229_1.2 R229_2.1 R229_2.2 R230_1.1 R230_1.2 R230_2.1 R230_2.2 R231_1.1 R231_1.2 R231_2.1 R231_2.2 R232_1.1 R232_1.2 R232_2.1 R232_2.2 R400.1 R400.2 R401.1 R401.2 R500.1 R500.2 R501.1 R501.2 R502.1 R502.2 R503.1 R503.2 R504.1 R504.2 R505.1 R505.2 R506.1 R506.2 R507.1 R507.2 R508.1 R508.2 R509.1 R509.2 R510.1 R510.2 R511.1 R511.2 R512.1 R512.2 R513.1 R513.2 R514.1 R514.2 R515.1 R515.2 R516.1 R516.2 R517.1 R517.2 R518.1 R518.2 R519.1 R519.2 R520.1 R520.2 R521.1 R521.2 R522.1 R522.2 R523.1 R523.2 R524.1 R524.2 R525.1 R525.2 R526.1 R526.2 R600.1 R600.2 R601.1 R601.2 R602.1 R602.2 R603.1 R603.2 R604.1 R604.2 R605.1 R605.2 R606.1 R606.2 R607.1 R607.2 R608.1 R608.2 R609.1 R609.2 R610.1 R610.2 R611.1 R611.2 R612.1 R612.2 R613.1 R613.2 R614.1 R614.2 R615.1 R615.2 R616.1 R616.2 R617.1 R617.2 R618.1 R618.2 R619.1 R619.2 R620.1 R620.2 R621.1 R621.2 R622.1 R622.2 R623.1 R623.2 R624.1 R624.2 R625.1 R625.2 R626.1 R626.2 R627.1 R627.2 R628.1 R628.2 R629.1 R629.2 R630.1 R630.2 R631.1 R631.2 R632.1 R632.2 R633.1 R633.2 R634.1 R634.2 R635.1 R635.2 R636.1 R636.2 R637.1 R637.2 R638.1 R638.2 R639.1 R639.2 R640.1 R640.2 R641.1 R641.2 R642.1 R642.2 R643.1 R643.2 R700.1 R700.2 R701.1 R701.2 R702.1 R702.2 R703.1 R703.2 R704.1 R704.2 R705.1 R705.2 R706.1 R706.2 R707.1 R707.2 R708.1 R708.2 R709.1 R709.2 R710.1 R710.2 R711.1 R711.2 R712.1 R712.2 R713.1 R713.2 R714.1 R714.2 R715.1 R715.2 R716.1 R716.2 R717.1 R717.2 R718.1 R718.2 R719.1 R719.2 R720.1 R720.2 R721.1 R721.2 R722.1 R722.2 R723.1 R723.2 R724.1 R724.2 R725.1 R725.2 R726.1 R726.2 R727.1 R727.2 R728.1 R728.2 R729.1 R729.2 R730.1 R730.2 R731.1 R731.2 R732.1 R732.2 R733.1 R733.2 R734.1 R734.2 R735.1 R735.2 R736.1 R736.2 R737.1 R737.2 R738.1 R738.2 R739.1 R739.2 R740.1 R740.2 R741.1 R741.2 R800.1 R800.2 R801.1 R801.2 R802.1 R802.2 R803.1 R803.2 R804.1 R804.2 R805.1 R805.2 R806.1 R806.2 R807.1 R807.2 R808.1 R808.2 R809.1 R809.2 R810.1 R810.2 R850.1 R850.2 R851.1 R851.2 R852.1 R852.2 R853.1 R853.2 R854.1 R854.2 R900.1 R900.2 R901.1 R901.2 R902.1 R902.2 R903.1 R903.2 R904.1 R904.2 R905.1 R905.2 R906.1 R906.2 R907.1 R907.2 R908.1 R908.2 R909.1 R909.2 R910.1 R910.2 R911.1 R911.2 R912.1 R912.2 R913.1 R913.2 R914.1 R914.2 R915.1 R915.2 R916.1 R916.2 R917.1 R917.2 R918.1 R918.2 R919.1 R919.2 R920.1 R920.2 R921.1 R921.2 R922.1 R922.2 R923.1 R923.2 R924.1 R924.2 R925.1 R925.2 R926.1 R926.2 R927.1 R927.2 R928.1 R928.2 R929.1 R929.2 R930.1 R930.2 R931.1 R931.2 R932.1 R932.2 R933.1 R933.2 T600.1 T600.2 T600.3 T600.4 T600.5 T600.6 T600.7 T600.8 T600.9 T600.10 T600.11 T600.12 T601.1 T601.2 T601.3 T601.4 T601.5 T601.6 T601.7 T601.8 T601.9 T601.10 T601.11 T601.12 TPL_H_N.1 TPL_H_P.1 TPL_L_N.1 TPL_L_P.1 U200_1.1 U200_1.2 U200_1.3 U200_1.4 U200_1.5 U200_1.6 U200_1.7 U200_1.8 U200_2.1 U200_2.2 U200_2.3 U200_2.4 U200_2.5 U200_2.6 U200_2.7 U200_2.8 U201_1.1 U201_1.2 U201_1.3 U201_1.4 U201_1.5 U201_1.6 U201_1.7 U201_1.8 U201_1.9 U201_1.10 U201_1.11 U201_1.12 U201_1.13 U201_1.14 U201_1.15 U201_1.16 U201_2.1 U201_2.2 U201_2.3 U201_2.4 U201_2.5 U201_2.6 U201_2.7 U201_2.8 U201_2.9 U201_2.10 U201_2.11 U201_2.12 U201_2.13 U201_2.14 U201_2.15 U201_2.16 U202_1.1 U202_1.2 U202_1.3 U202_1.4 U202_1.5 U202_2.1 U202_2.2 U202_2.3 U202_2.4 U202_2.5 U400.1 U400.2 U400.3 U400.4 U400.5 U400.6 U400.7 U400.8 U600.1 U600.2 U600.3 U600.4 U600.5 U600.6 U600.7 U600.8 U600.9 U600.10 U600.11 U600.12 U600.13 U600.14 U600.15 U600.16 U600.17 U600.18 U600.19 U600.20 U600.21 U600.22 U600.23 U600.24 U600.25 U600.26 U600.27 U600.28 U600.29 U600.30 U600.31 U600.32 U600.33 U600.34 U600.35 U600.36 U600.37 U600.38 U600.39 U600.40 U600.41 U600.42 U600.43 U600.44 U600.45 U600.46 U600.47 U600.48 U600.49 U600.50 U600.51 U600.52 U600.53 U600.54 U600.55 U600.56 U600.57 U600.58 U600.59 U600.60 U600.61 U600.62 U600.63 U600.64 U600.65 U601.1 U601.2 U601.3 U601.4 U601.5 U601.6 U601.7 U601.8 U601.9 U601.10 U601.11 U601.12 U800.1 U800.2 U800.3 U800.4 U800.5 U800.6 U800.7 U800.8 U800.9 U850.1 U850.2 U850.3 U850.4 U850.5 U850.6 U850.7 U850.8 U850.9 U851.1 U851.2 U851.3 U851.4 U851.5 U851.6 U851.7 U851.8 U851.9 U900.1 U900.2 U900.3 U900.4 U900.5 U900.6 U900.7 U900.8 U900.9 U900.10 U900.11 U900.12 U900.13 U900.14 U900.15 U900.16 U900.17 U900.18 U900.19 U900.20 U900.21 U900.22 U900.23 U900.24 U920.1 U920.2 U920.3 U920.4 U920.5 U920.6 U920.7 U920.8 U921.1 U921.2 U921.3 U921.4 U921.5 U921.6 U921.7 U921.8 U921.9 U922.1 U922.2 U922.3 U922.4 U922.5 U922.6 U922.7 U922.8 Vaux.1 Vbat.1 Vbat_con_ext.1 Vddc.1 Vin_DCDC.1 Vmodule.1